# EAGLE board BALPGAS2 (EAGLE 7.2.0)
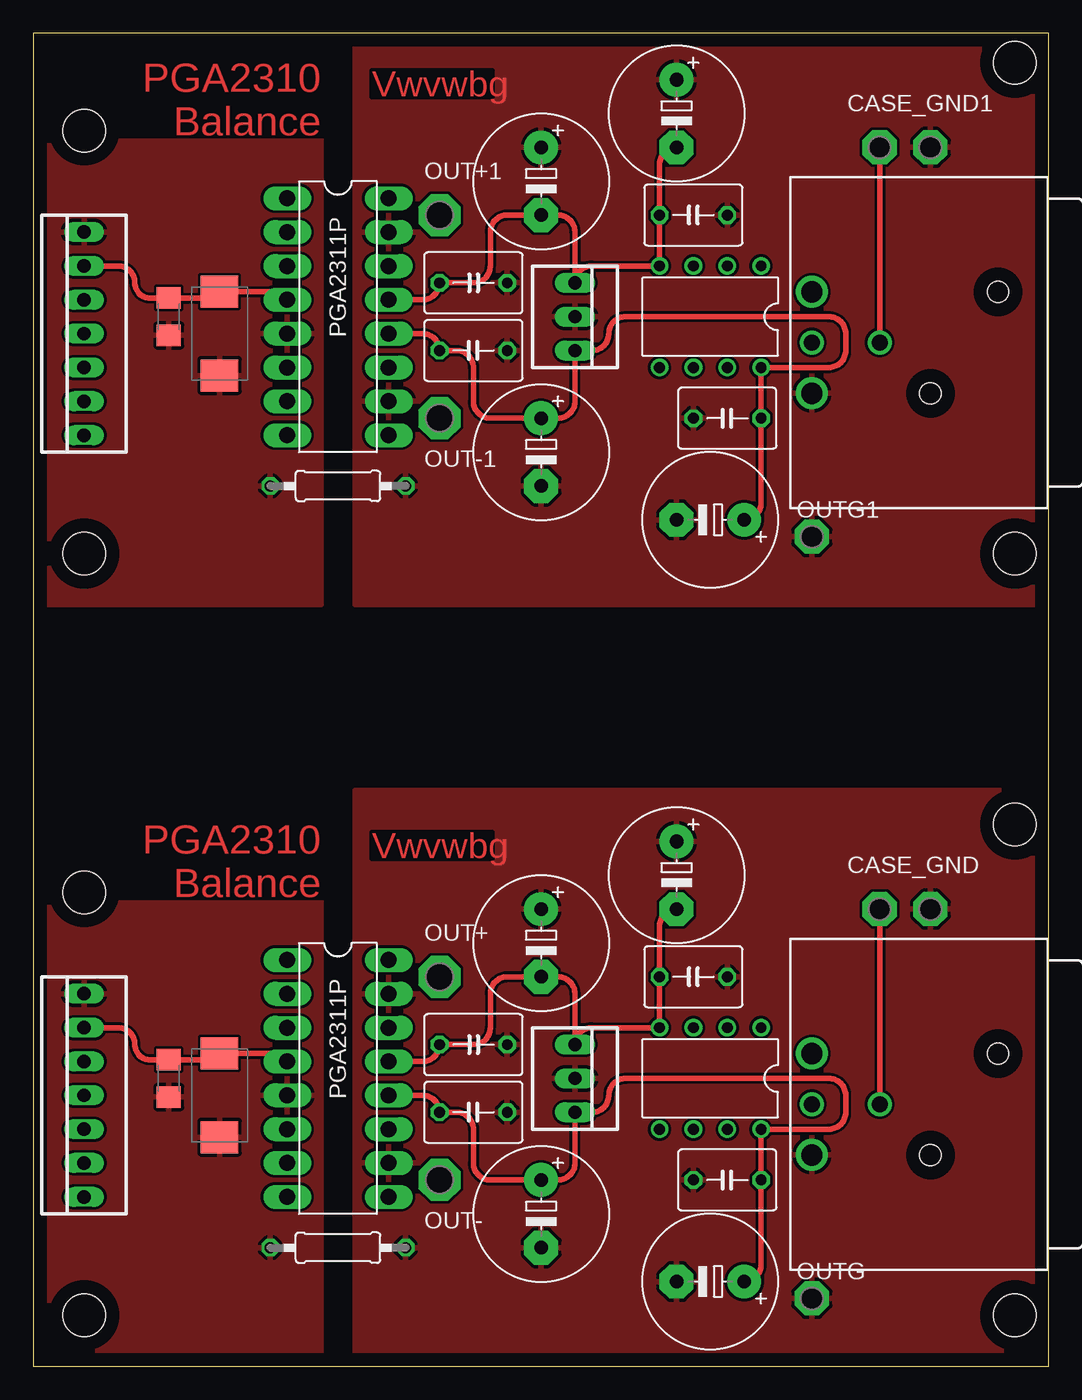
[diagram p0: board, top side]
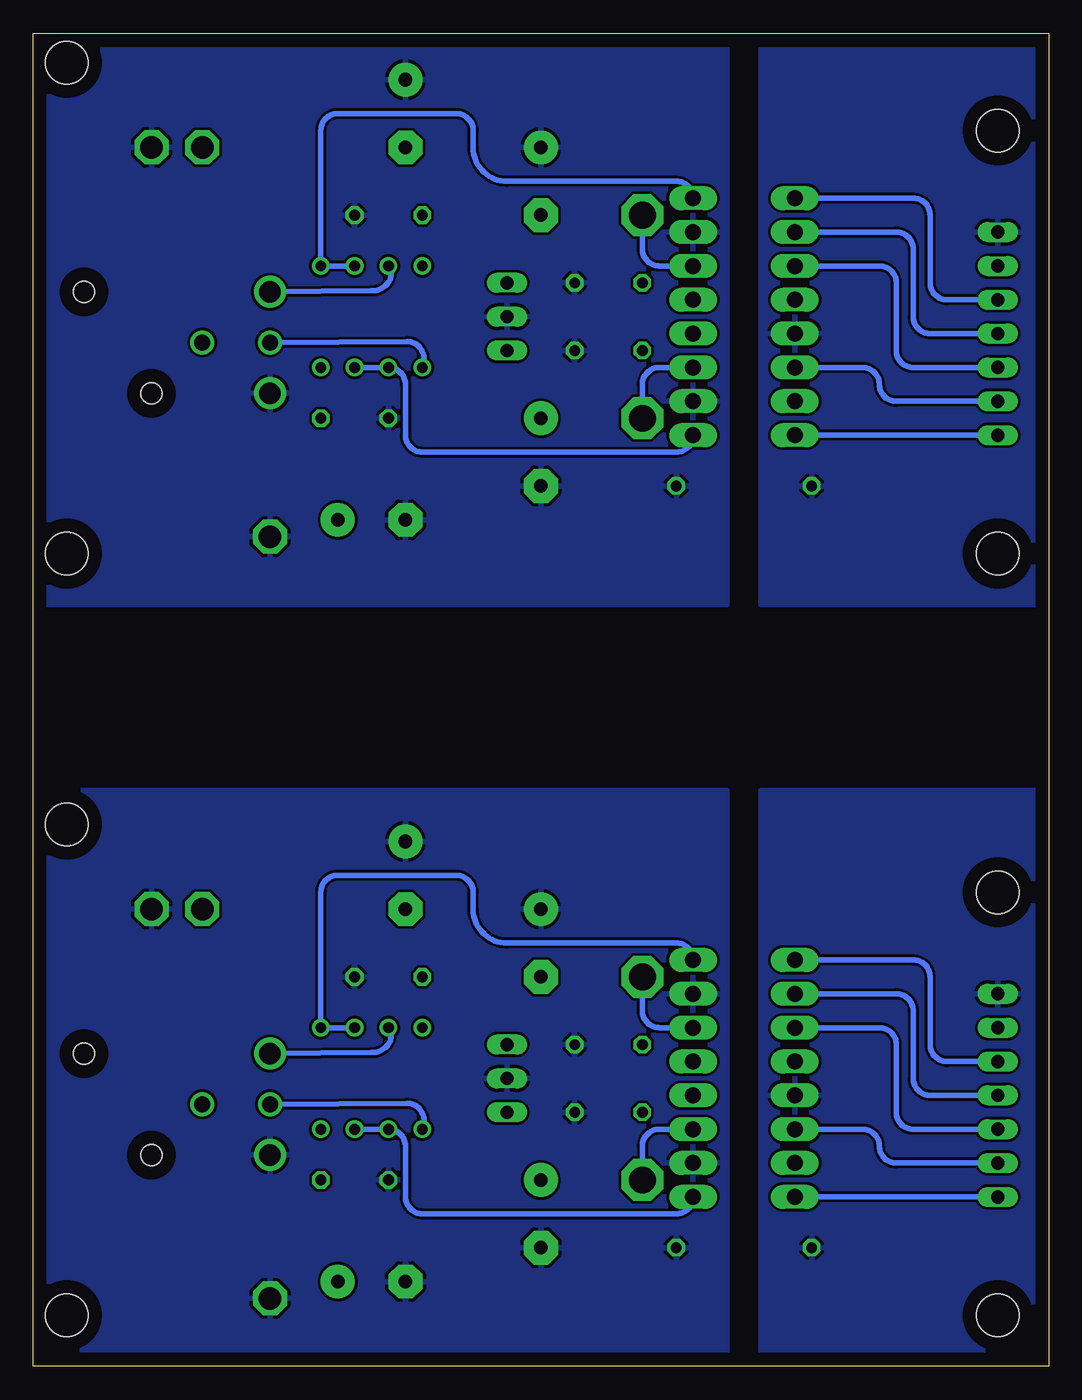
[diagram p1: board, bottom side, seen from below]

Size 76.18 x 100 mm. Coordinates in mm from the lower left corner, seen from the top.
Outline: 0,0 76.18,0 76.18,100 0,100 0,0
Copper layers (1*16): Top 0.035mm / dielectric 1.5mm / Bottom 0.035mm
Design rules "default": minimum track width 10mil, minimum drill 24mil, track to track 8mil, track to pad 8mil, pad to pad 8mil, via to via 8mil, smd to smd 8mil, copper to edge 40mil, drill to drill 8mil, minimum pad ring 10mil, minimum via ring 8mil, stop-mask expansion 4mil, vias tented up to drill 0mil, thermal gap 10mil
Holes 3.2 mm at 3.81,3.81 73.66,3.81 73.66,40.64 3.81,35.56 3.81,60.96 73.66,60.96 73.66,97.79 3.81,92.71

## Footprints (pad centres in the part's own frame; a part is rotated, then mirrored left to right if it is on the bottom)
E5-10,5 = drill 1.016 pad 2.54: + -2.54,0 | drill 1.016 pad 2.54 octagon: - 2.54,0
SMC_D = smd 2.4 x 2.8: + -3.15,0; - 3.15,0
C050-045X075 = drill 0.813 octagon: 1 -2.54,0; 2 2.54,0
C1206 = smd 1.6 x 1.8: 1 -1.4,0; 2 1.4,0
P1-17 = drill 1.702 pad 2.54 octagon: TP 0,0
DIL16 = drill 1.2 long: 1 -8.89,-3.81; 2 -6.35,-3.81; 3 -3.81,-3.81; 4 -1.27,-3.81; 5 1.27,-3.81; 6 3.81,-3.81; 7 6.35,-3.81; 8 8.89,-3.81; 9 8.89,3.81; 10 6.35,3.81; 11 3.81,3.81; 12 1.27,3.81; 13 -1.27,3.81; 14 -3.81,3.81; 15 -6.35,3.81; 16 -8.89,3.81
DIL08 = drill 0.813 pad 1.27: 1 -3.81,-3.81; 2 -1.27,-3.81; 3 1.27,-3.81; 4 3.81,-3.81; 5 3.81,3.81; 6 1.27,3.81; 7 -1.27,3.81; 8 -3.81,3.81
NC3MBH = drill 1.6: 1 3.81,0; 2 -3.81,0 | drill 1.2: 3 0,0; G 0,5.08 | hole 1.6: -3.81,13.97; 3.81,8.89
P1-20 = drill 2.007 pad 3.15 octagon: TP 0,0
0207/10 = drill 0.813 octagon: 1 -5.08,0; 2 5.08,0
22-23-2031 = drill 1 long: 1 -2.54,0; 2 0,0; 3 2.54,0
22-23-2071 = drill 1 long: 1 -7.62,0; 2 -5.08,0; 3 -2.54,0; 4 0,0; 5 2.54,0; 6 5.08,0; 7 7.62,0

## Placement (x,y rotation side)
C1  [E5-10,5]  38.1,31.75 270 top
C2  [E5-10,5]  38.1,11.43 270 top
C3  [E5-10,5]  38.1,88.9 270 top
C4  [SMC_D]  13.97,77.47 270 top
C5  [C050-045X075]  33.02,24.13 0 top
C6  [C1206]  10.16,78.74 90 top
C7  [C050-045X075]  33.02,19.05 180 top
C8  [E5-10,5]  50.8,63.5 180 top
C9  [E5-10,5]  38.1,68.58 270 top
C10  [E5-10,5]  48.26,93.98 270 top
C11  [C050-045X075]  52.07,71.12 180 top
C12  [C050-045X075]  49.53,86.36 180 top
C13  [SMC_D]  13.97,20.32 270 top
C14  [C1206]  10.16,21.59 90 top
C15  [C050-045X075]  33.02,81.28 0 top
C16  [C050-045X075]  33.02,76.2 180 top
C19  [E5-10,5]  50.8,6.35 180 top
C20  [E5-10,5]  48.26,36.83 270 top
C25  [C050-045X075]  52.07,13.97 180 top
C26  [C050-045X075]  49.53,29.21 180 top
CASE_GND  PTR1PAD1-17  [P1-17]  63.5,34.29 0 top
CASE_GND1  PTR1PAD1-17  [P1-17]  63.5,91.44 0 top
GR1  PTR1PAD1-17  [P1-17]  67.31,34.29 0 top
GR2  PTR1PAD1-17  [P1-17]  67.31,91.44 0 top
IC1  PGA2311P  [DIL16]  22.86,21.59 270 top
IC2  [DIL08]  50.8,21.59 180 top
IC3  PGA2311P  [DIL16]  22.86,78.74 270 top
IC4  [DIL08]  50.8,78.74 180 top
LI  NC3MBH  [NC3MBH]  58.42,19.65 270 top
LI1  NC3MBH  [NC3MBH]  58.42,76.8 270 top
OUT+  TPPAD1-20  [P1-20]  30.48,29.21 0 top
OUT+1  TPPAD1-20  [P1-20]  30.48,86.36 0 top
OUT-  TPPAD1-20  [P1-20]  30.48,13.97 0 top
OUT-1  TPPAD1-20  [P1-20]  30.48,71.12 0 top
OUTG  PTR1PAD1-17  [P1-17]  58.42,5.08 0 top
OUTG1  PTR1PAD1-17  [P1-17]  58.42,62.23 0 top
R1  [0207/10]  22.86,8.89 0 top
R2  [0207/10]  22.86,66.04 0 top
X1  22-23-2031  [22-23-2031]  40.64,21.59 270 top
X2  22-23-2071  [22-23-2071]  3.81,20.32 90 top
X3  22-23-2031  [22-23-2031]  40.64,78.74 270 top
X4  22-23-2071  [22-23-2071]  3.81,77.47 90 top

## Library data of the parts
C1-C3 C5 C7-C12 C15 C16 C19 C20 C25 C26 IC1 IC3 = Vwvwbg
C4 C6 C13 C14 R1 R2 = resistor
CASE_GND CASE_GND1 GR1 GR2 OUT+ OUT+1 OUT- OUT-1 OUTG OUTG1 = testpad
IC2 IC4 = linear
LI LI1 = con-neutrik_ag; MF: NEUTRIK; MPN: NC3MBH; OC_FARNELL: unknown; OC_NEWARK: 91F3470
X1 X3 = con-molex; MF: MOLEX; MPN: 22-23-2031; OC_FARNELL: 1462950; OC_NEWARK: 30C0862
X2 X4 = con-molex; MF: MOLEX; MPN: 22-23-2071; OC_FARNELL: 1654534; OC_NEWARK: 56H0445

## Nets
+5V: C13.+ C14.2 IC1.4 X2.6
+5V1: C4.+ C6.2 IC3.4 X4.6
+15V: C2.+ C7.2 C19.+ C25.1 IC1.12 IC2.8 X1.3
+15V1: C8.+ C9.+ C11.1 C16.2 IC3.12 IC4.8 X3.3
-15V: C1.- C5.1 C20.- C26.2 IC1.13 IC2.4 X1.1
-15V1: C3.- C10.- C12.2 C15.1 IC3.13 IC4.4 X3.1
CS: IC1.2 X2.4
CS1: IC3.2 X4.4
DGND: C13.- C14.1 IC1.5 R1.1 X2.7
DGND1: C4.- C6.1 IC3.5 R2.1 X4.7
GND: C1.+ C2.- C5.2 C7.1 C19.- C20.+ C25.2 C26.1 GR1.TP IC1.10 IC1.15 LI.1 OUTG.TP R1.2 X1.2
GND1: C3.+ C8.- C9.- C10.+ C11.2 C12.1 C15.2 C16.1 GR2.TP IC3.10 IC3.15 LI1.1 OUTG1.TP R2.2 X3.2
MUTE: IC1.8 X2.1
MUTE1: IC3.8 X4.1
N$1: IC1.9 IC2.6 IC2.7
N$2: IC2.3 LI.2
N$3: CASE_GND.TP LI.G
N$4: IC2.5 LI.3
N$5: IC3.16 IC4.1 IC4.2
N$6: IC3.14 OUT+1.TP
N$7: IC3.11 OUT-1.TP
N$8: IC3.7
N$9: IC1.7
N$10: IC1.16 IC2.1 IC2.2
N$11: IC1.11 OUT-.TP
N$12: IC1.14 OUT+.TP
N$13: IC3.9 IC4.6 IC4.7
N$14: IC4.3 LI1.2
N$15: IC4.5 LI1.3
N$16: CASE_GND1.TP LI1.G
SCLK: IC1.6 X2.2
SCLK1: IC3.6 X4.2
SDI: IC1.3 X2.3
SDI1: IC3.3 X4.3
ZCEN: IC1.1 X2.5
ZCEN1: IC3.1 X4.5

## Tracks (layer width: path | path; a pad name or v marks a point on that pad's centre or on a via)
+5V
  Top 0.406: IC1.4 arc90 18.44,23.47 C13.+ arc-90 13.49,22.99 C14.2 8.76,22.99 arc-90 7.62,24.13 arc90 6.35,25.4 X2.6
+5V1
  Top 0.406: IC3.4 arc90 18.44,80.62 C4.+ arc-90 13.49,80.14 C6.2 8.76,80.14 arc-90 7.62,81.28 arc90 6.35,82.55 X4.6
+15V
  Top 0.406: IC1.12 29.21,20.32 arc-90 C7.2 31.75,19.05 arc-90 33.02,17.78 33.02,15.24 arc90 34.29,13.97 C2.+ 39.37,13.97 arc90 40.64,15.24 X1.3 41.91,19.05 arc90 43.18,20.32 arc-90 44.45,21.59 59.69,21.59 arc-90 60.96,20.32 60.96,19.05 arc-90 59.69,17.78 IC2.8 C25.1 54.61,7.62 arc-90 C19.+
+15V1
  Top 0.406: IC3.12 29.21,77.47 arc-90 C16.2 31.75,76.2 arc-90 33.02,74.93 33.02,72.39 arc90 34.29,71.12 C9.+ 39.37,71.12 arc90 40.64,72.39 X3.3 41.91,76.2 arc90 43.18,77.47 arc-90 44.45,78.74 59.69,78.74 arc-90 60.96,77.47 60.96,76.2 arc-90 59.69,74.93 IC4.8 C11.1 54.61,64.77 arc-90 C8.+
-15V
  Top 0.406: IC1.13 29.21,22.86 arc90 C5.1 33.02,24.13 arc90 34.29,25.4 34.29,27.94 arc-90 35.56,29.21 C1.- 39.37,29.21 arc-90 40.64,27.94 X1.1 arc-90 41.91,25.4 IC2.4 C26.2 46.99,33.02 arc-90 C20.-
-15V1
  Top 0.406: IC3.13 29.21,80.01 arc90 C15.1 33.02,81.28 arc90 34.29,82.55 34.29,85.09 arc-90 35.56,86.36 C3.- 39.37,86.36 arc-90 40.64,85.09 X3.1 arc-90 41.91,82.55 IC4.4 C12.2 46.99,90.17 arc-90 C10.-
CS
  Bottom 0.406: IC1.2 11.43,27.94 arc90 10.16,26.67 10.16,21.59 arc-90 8.89,20.32 X2.4
CS1
  Bottom 0.406: IC3.2 11.43,85.09 arc90 10.16,83.82 10.16,78.74 arc-90 8.89,77.47 X4.4
DGND
  pour Top: 0,43.18 21.59,43.18 21.59,0 0,0
  pour Bottom: 0,43.18 21.59,43.18 21.59,0 0,0
DGND1
  pour Top: 0,100.33 21.59,100.33 21.59,57.15 0,57.15
  pour Bottom: 0,100.33 21.59,100.33 21.59,57.15 0,57.15
GND
  pour Top: 24.13,43.18 24.13,0 76.2,0 76.2,43.18
  pour Bottom: 24.13,43.18 24.13,0 76.2,0 76.2,43.18
GND1
  pour Top: 24.13,100.33 24.13,57.15 76.2,57.15 76.2,100.33
  pour Bottom: 24.13,100.33 24.13,57.15 76.2,57.15 76.2,100.33
MUTE
  Bottom 0.406: X2.1 IC1.8
MUTE1
  Bottom 0.406: X4.1 IC3.8
N$1
  Bottom 0.406: IC2.7 IC2.6 arc90 48.26,16.51 48.26,12.7 arc-90 46.99,11.43 27.94,11.43 arc-90 IC1.9
N$2
  Bottom 0.406: LI.2 50.79,23.53 arc-40 49.74,23.92 arc-83 IC2.3
N$3
  Top 0.406: CASE_GND.TP LI.G
N$4
  Bottom 0.406: LI.3 48.12,19.72 arc55 47.13,19.21 arc59 IC2.5
N$5
  Bottom 0.406: IC4.2 IC4.1 54.61,92.71 arc90 53.34,93.98 44.45,93.98 arc90 43.18,92.71 43.18,91.44 arc-90 40.64,88.9 27.94,88.9 arc90 IC3.16
N$6
  Bottom 0.406: IC3.14 29.21,82.55 arc90 30.48,83.82 OUT+1.TP
N$7
  Bottom 0.406: IC3.11 29.21,74.93 arc-90 30.48,73.66 OUT-1.TP
N$10
  Bottom 0.406: IC2.2 IC2.1 54.61,35.56 arc90 53.34,36.83 44.45,36.83 arc90 43.18,35.56 43.18,34.29 arc-90 40.64,31.75 27.94,31.75 arc90 IC1.16
N$11
  Bottom 0.406: IC1.11 29.21,17.78 arc-90 30.48,16.51 OUT-.TP
N$12
  Bottom 0.406: IC1.14 29.21,25.4 arc90 30.48,26.67 OUT+.TP
N$13
  Bottom 0.406: IC4.7 IC4.6 arc90 48.26,73.66 48.26,69.85 arc-90 46.99,68.58 27.94,68.58 arc-90 IC3.9
N$14
  Bottom 0.406: LI1.2 50.79,80.68 arc-40 49.74,81.07 arc-83 IC4.3
N$15
  Bottom 0.406: LI1.3 48.12,76.87 arc55 47.13,76.36 arc59 IC4.5
N$16
  Top 0.406: CASE_GND1.TP LI1.G
SCLK
  Bottom 0.406: X2.2 11.43,15.24 arc90 12.7,16.51 arc-90 13.97,17.78 IC1.6
SCLK1
  Bottom 0.406: X4.2 11.43,72.39 arc90 12.7,73.66 arc-90 13.97,74.93 IC3.6
SDI
  Bottom 0.406: X2.3 10.16,17.78 arc90 11.43,19.05 11.43,24.13 arc-90 12.7,25.4 IC1.3
SDI1
  Bottom 0.406: X4.3 10.16,74.93 arc90 11.43,76.2 11.43,81.28 arc-90 12.7,82.55 IC3.3
ZCEN
  Bottom 0.406: X2.5 7.62,22.86 arc90 8.89,24.13 8.89,29.21 arc-90 10.16,30.48 IC1.1
ZCEN1
  Bottom 0.406: X4.5 7.62,80.01 arc90 8.89,81.28 8.89,86.36 arc-90 10.16,87.63 IC3.1

## Text on the board
Top: PGA2310 / Balance | Vwvwbg | PGA2310 / Balance | Vwvwbg